# EAGLE board algio_steperio_plokste (EAGLE 7.2.0)

Size 120 x 52 mm. Coordinates in mm from the lower left corner, seen from the top.
Outline: 0,0 120,0 120,35 115,35 115,41 95,41 95,52 25,52 25,41 5,41 5,35 0,35 0,0
Outline: circle at 22,9 radius 3.16
Outline: circle at 31,45 radius 3.16
Outline: circle at 89,45 radius 3.16
Outline: circle at 98,9 radius 3.16
Copper layers (1*16): Top 0.035mm / dielectric 1.5mm / Bottom 0.035mm
Design rules "default *": minimum track width 10mil, minimum drill 24mil, track to track 8mil, track to pad 8mil, pad to pad 8mil, via to via 8mil, smd to smd 8mil, copper to edge 40mil, drill to drill 8mil, minimum pad ring 10mil, minimum via ring 8mil, stop-mask expansion 4mil, vias tented up to drill 0mil, thermal gap 10mil
Holes 3.2 mm at 31,45 89,45 22,9 98,9

## Footprints (pad centres in the part's own frame; a part is rotated, then mirrored left to right if it is on the bottom)
E1,8-4 = drill 0.711 pad 1.168: + -0.889,0 | drill 0.711 pad 1.168 octagon: - 0.889,0
E2,5-6 = drill 0.813 pad 1.6: + -1.27,0 | drill 0.813 pad 1.6 octagon: - 1.27,0
TO220S = drill 1.016 long: 1 -2.54,-2.54; 2 0,-2.54; 3 2.54,-2.54
DIL20 = drill 0.813 long: 1 -11.43,-3.81; 2 -8.89,-3.81; 3 -6.35,-3.81; 4 -3.81,-3.81; 5 -1.27,-3.81; 6 1.27,-3.81; 7 3.81,-3.81; 8 6.35,-3.81; 9 8.89,-3.81; 10 11.43,-3.81; 11 11.43,3.81; 12 8.89,3.81; 13 6.35,3.81; 14 3.81,3.81; 15 1.27,3.81; 16 -1.27,3.81; 17 -3.81,3.81; 18 -6.35,3.81; 19 -8.89,3.81; 20 -11.43,3.81
TQFP32-08 = smd 1.27 x 0.559: 1 -4.293,2.8; 2 -4.293,2; 3 -4.293,1.2; 4 -4.293,0.4; 5 -4.293,-0.4; 6 -4.293,-1.2; 7 -4.293,-2; 8 -4.293,-2.8; 17 4.293,-2.8; 18 4.293,-2; 19 4.293,-1.2; 20 4.293,-0.4; 21 4.293,0.4; 22 4.293,1.2; 23 4.293,2; 24 4.293,2.8 | smd 0.559 x 1.27: 9 -2.8,-4.293; 10 -2,-4.293; 11 -1.2,-4.293; 12 -0.4,-4.293; 13 0.4,-4.293; 14 1.2,-4.293; 15 2,-4.293; 16 2.8,-4.293; 25 2.8,4.293; 26 2,4.293; 27 1.2,4.293; 28 0.4,4.293; 29 -0.4,4.293; 30 -1.2,4.293; 31 -2,4.293; 32 -2.8,4.293
FTR-LYC = drill 0.8 pad 1.6: 1 -3.78,0; 2 0,0 | drill 1.2 pad 2.184: 3 11.34,0; 4 16.38,0; 5 21.42,0
CA6V = drill 1.016 long: A -2.54,-2.54; E 2.54,-2.54; S 0,2.54
EDG-08 = drill 0.813 long: 1 -8.89,-3.81; 2 -6.35,-3.81; 3 -3.81,-3.81; 4 -1.27,-3.81; 5 1.27,-3.81; 6 3.81,-3.81; 7 6.35,-3.81; 8 8.89,-3.81; 9 8.89,3.81; 10 6.35,3.81; 11 3.81,3.81; 12 1.27,3.81; 13 -1.27,3.81; 14 -3.81,3.81; 15 -6.35,3.81; 16 -8.89,3.81
GMSTBV2 = drill 1.397 long: 1 -3.81,0; 2 3.81,0
6410-04 = drill 1 long: 1 3.81,0; 2 1.27,0; 3 -1.27,0; 4 -3.81,0
ML10 = drill 0.9 square: 1 -5.08,-1.27 | drill 0.9: 2 -5.08,1.27; 3 -2.54,-1.27; 4 -2.54,1.27; 5 0,-1.27; 6 0,1.27; 7 2.54,-1.27; 8 2.54,1.27; 9 5.08,-1.27; 10 5.08,1.27
W237-103 = drill 1.194 long: 1 -5,-1.29; 2 0,-1.29; 3 5,-1.29
QQQ = drill 1 square: 1 -3.81,0 | drill 1: 2 -1.27,0; 3 1.27,0; 4 3.81,0
MICROMATCH-6 = drill 0.813: 1 3.175,1.27; 2 1.905,-1.27; 3 0.635,1.27; 4 -0.635,-1.27; 5 -1.905,1.27; 6 -3.175,-1.27

## Placement (x,y rotation side)
C10  [E1,8-4]  81,44 90 top
C12  [E1,8-4]  103,19 90 top
C18  [E2,5-6]  101,35 90 top
DA1  [TO220S]  114,19 270 top
E$1  [D02S]  114,35 90 top
E$2  [D02S]  114,19 90 top
IC4  [DIL20]  60,31 180 top
IC5  [TQFP32-08]  67,19 180 top
IC7  [TO220S]  114,35 270 top
K1  [FTR-LYC]  29,36.6 180 top
RP1  [CA6V]  94,19 0 top
RP2  [CA6V]  86,19 0 top
RP3  [CA6V]  78,19 0 top
S1  [EDG-08]  86,30 0 top
X1  COIL A  [GMSTBV2]  112,4 0 top
X3  COIL B  [GMSTBV2]  8,4 0 top
X4  MODBUS  [6410-04]  86,5 0 top
X6  CONTROL OUT  [ML10]  60,42 180 top
X11  RELAY  [W237-103]  12,27 270 top
X12  LEDS  [6410-04]  40,37 180 top
X13  [QQQ]  72,5 0 top
X14  [MICROMATCH-6]  56,19 90 top
X15  [QQQ]  60,5 0 top

## Library data of the parts
C10 C12 C18 = rcl
DA1 IC7 = v-reg
E$1 E$2 = heatsink
IC4 = ic-package
IC5 = atmel
K1 = relay
RP1-RP3 = pot
S1 = special
X1 X3 = con-phoenix-508
X4 X12 = con-molex
X6 = con-ml
X11 = con-wago-500
X13 X15 = connectors
X14 = con-amp-micromatch

## Text on the board
tDocu: LED1 | LED2 | LED3 | COM | COM | NO | NC | 0-10V | GND | DIR | GND | GND | HALL | +20V | +20V | RSB | RSA | GND | B | !B | A | !A | INPUTS | LED: | OPTION | DARK | LIGHT | FLASH/BLINK | LED1 | HALL SENSOR | FAULT/SIGNAL | LED2 | CONTROL MODE | STOP | RUN | SCROLL | LED3 | S1 SW: | OPTION | OFF | ON | S1.1 | CONTROL | MANUAL | MODBUS | S1.2 | HALL SENSOR DETECT | YES | NO | S1.3 | MAX RPM | 150 | 200 | S1.4 | DIRECTION | CW | CCW | S1.5 | SCROLLING | NO | YES | S1.6 | MOTOR IMAX SET1 | NOT AVAILABLE | 3.2A | S1.7 | MOTOR IMAX SET2 | NOT AVAILABLE | S1.8 | MOTOR IMAX SET3 | NOT AVAILABLE